# EAGLE board hasselblad production ready (EAGLE 6.5.0)
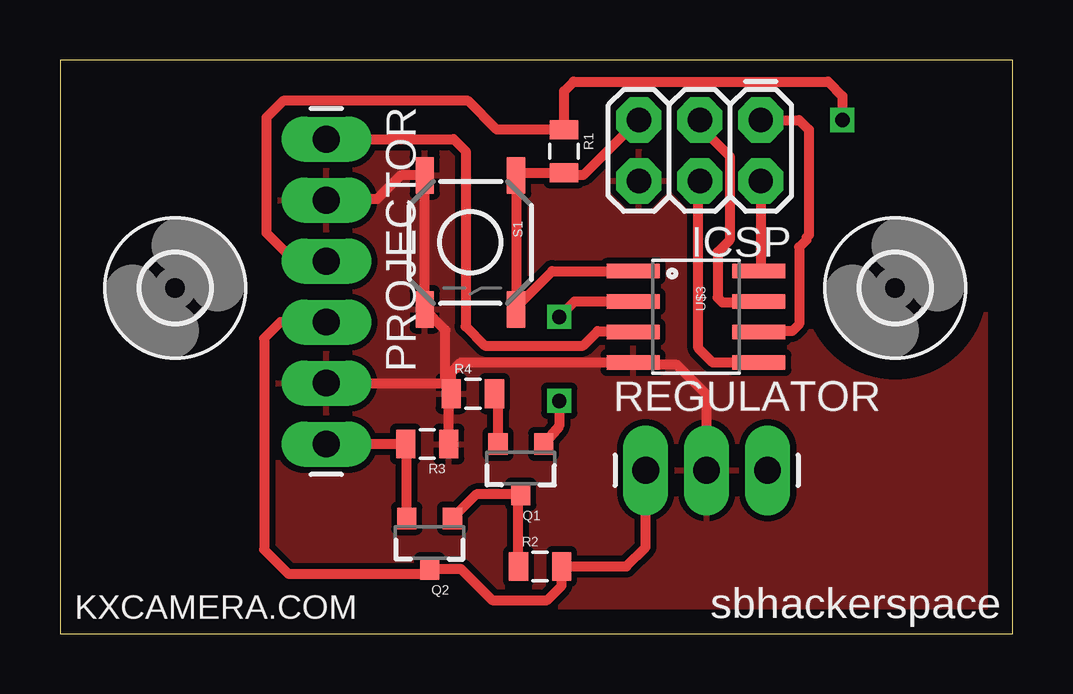
[diagram p0: board, top side]
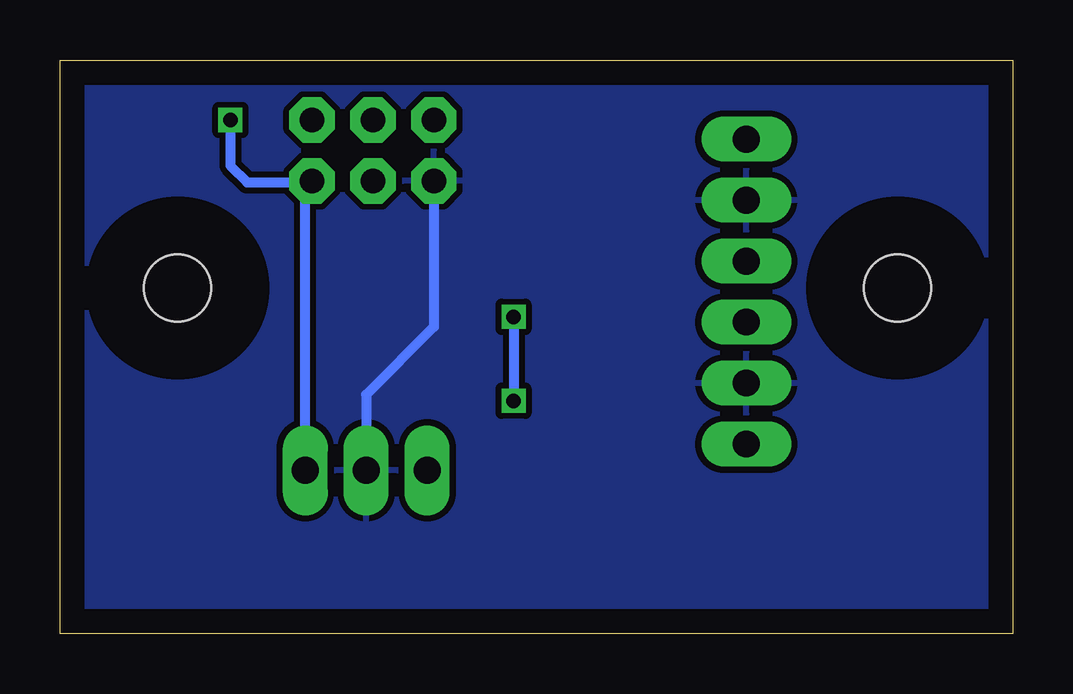
[diagram p1: board, bottom side, seen from below]

Size 39.7 x 23.9 mm. Coordinates in mm from the lower left corner, seen from the top.
Outline: 0,0 39.7,0 39.7,23.9 0,23.9 0,0
Copper layers (1*16): Top 0.035mm / dielectric 1.5mm / Bottom 0.035mm
Design rules "default": minimum track width 10mil, minimum drill 24mil, track to track 8mil, track to pad 8mil, pad to pad 8mil, via to via 8mil, smd to smd 8mil, copper to edge 40mil, drill to drill 8mil, minimum pad ring 10mil, minimum via ring 8mil, stop-mask expansion 4mil, vias tented up to drill 0mil, thermal gap 10mil

## Footprints (pad centres in the part's own frame; a part is rotated, then mirrored left to right if it is on the bottom)
2X3 = drill 1.016 pad 1.88 octagon: 1 0,0; 2 0,2.54; 3 2.54,0; 4 2.54,2.54; 5 5.08,0; 6 5.08,2.54
1X06_LONGPADS = drill 1.118 pad 1.88 long: 1 0,0; 2 2.54,0; 3 5.08,0; 4 7.62,0; 5 10.16,0; 6 12.7,0
SOT23-3 = smd 0.8 x 0.9: 1 -0.95,-1; 2 0.95,-1; 3 0,1.1
0805 = smd 0.8 x 1.2: 1 -0.9,0; 2 0.9,0
1X03_LONGPADS = drill 1.118 pad 1.88 long: 1 0,0; 2 2.54,0; 3 5.08,0
TACTILE-SWITCH-SMD = smd 1.524 x 0.762: 1 -2.794,1.905; 2 2.794,1.905; 3 -2.794,-1.905; 4 2.794,-1.905
2,8 = hole 2.8: 0,0
SO08 = smd 0.61 x 2.21: 1 -1.905,-2.616; 2 -0.635,-2.616; 3 0.635,-2.616; 4 1.905,-2.616; 5 1.905,2.616; 6 0.635,2.616; 7 -0.635,2.616; 8 -1.905,2.616

## Placement (x,y rotation side)
ICSP  [2X3]  29.2,21.4 180 top
PROJECTOR  [1X06_LONGPADS]  11.1,20.6 270 top
Q1  MOSFET-PCHANNEL  [SOT23-3]  19.2,6.9 180 top
Q2  MOSFET-PCHANNEL  [SOT23-3]  15.4,3.8 180 top
R1  [0805]  21,20.1 270 top
R2  [0805]  20,2.8 0 top
R3  [0805]  15.3,7.9 180 top
R4  [0805]  17.2,10 0 top
REGULATOR  [1X03_LONGPADS]  24.4,6.8 0 top
S1  [TACTILE-SWITCH-SMD]  17.1,16.3 270 top
U$1  [2,8]  4.8,14.4 0 top
U$2  [2,8]  34.8,14.4 0 top
U$3  ATTINY13SOIC  [SO08]  26.5,13.2 270 top

## Library data of the parts
ICSP PROJECTOR REGULATOR = SparkFun-Connectors
Q1 Q2 = SparkFun-DiscreteSemi; PROD_ID: TRANS-08285
R1-R4 = SparkFun-Passives
S1 = SparkFun-Electromechanical
U$1 U$2 = holes
U$3 = SparkFun-DigitalIC

## Nets
5V: ICSP.2 PROJECTOR.3 R1.1 REGULATOR.3 U$3.8
GND: ICSP.6 PROJECTOR.2 PROJECTOR.5 R3.1 R4.1 REGULATOR.2 S1.3 S1.4 U$3.4
N$1: ICSP.4 U$3.5
N$2: ICSP.5 R1.2 S1.1 S1.2 U$3.1
N$3: Q1.1 U$3.2
N$4: ICSP.1 U$3.6
N$6: ICSP.3 U$3.7
N$7: Q1.2 R4.2
N$9: Q1.3 Q2.1 R2.1
OUTPUT: PROJECTOR.6 Q2.2 R3.2
POT: PROJECTOR.1 U$3.3
VCC: PROJECTOR.4 Q2.3 R2.2 REGULATOR.1

## Tracks (layer width: path | path; a pad name or v marks a point on that pad's centre or on a via)
5V  (via drill 0.6)
  Top 0.406: PROJECTOR.3 11.08,15.5 9.8,15.5 8.6,16.7 8.6,21.5 9.3,22.2 17,22.2 18.2,21 R1.1 21,22.6 21.4,23 32,23 32.6,22.4 v32.6,21.4 | ICSP.2 29.2,15.19 U$3.8
  Bottom 0.406: REGULATOR.3 29.48,18.4 | 29.48,18.4 29.48,18.58 ICSP.2 | v32.6,21.4 32.6,19.5 31.9,18.8 29.88,18.8 29.48,18.4
GND
  Top 0.406: R3.1 16.2,10.1 R4.1 | PROJECTOR.2 11.13,18.09 13.2,18.1 14.19,19.09 S1.3 S1.4 16.06,12.64 16.06,10.44 | REGULATOR.2 26.94,9.96 25.7,11.2 23.98,11.2 U$3.4 16.7,11.3 16.3,10.9 R4.1 | PROJECTOR.5 16.06,10.44 | 16.06,10.44 R4.1
  Bottom 0.406: ICSP.6 24.12,12.78 26.94,9.96 REGULATOR.2
  pour Top (isolate 0.254): 0.3,23.6 39.5,23.6 39.5,0.2 0.3,0.2 0.3,23.5
  pour Bottom (isolate 0.254): 0.3,23.6 39.5,23.6 39.5,0.2 0.3,0.2
N$1
  Top 0.406: U$3.5 27.21,11.3 26.6,11.9 26.6,18.8 ICSP.4
N$2
  Top 0.406: U$3.1 20.5,15.1 19,13.6 S1.2 S1.1 19.09,19.19 R1.2 21.1,19.1 21.8,19.1 24.1,21.4 ICSP.5
N$3  (via drill 0.6)
  Top 0.406: U$3.2 21.44,13.84 v20.8,13.2 | v20.8,9.7 20.8,8.65 Q1.1
  Bottom 0.406: v20.8,13.2 v20.8,9.7
N$4
  Top 0.406: ICSP.1 30.8,21.4 31.2,21 31.2,16.6 31.1,16.5 31.1,16.4 30.8,16.1 30.8,12.9 30.5,12.6 29.15,12.6 U$3.6
N$6
  Top 0.406: ICSP.3 26.66,21.14 27.9,19.9 27.9,16.4 27.4,15.9 27.4,14 27.6,13.8 29.08,13.8 U$3.7
N$7
  Top 0.406: Q1.2 18.25,10.05 R4.2
N$9
  Top 0.406: R2.1 19.1,5.8 Q1.3 17.35,5.8 Q2.1
OUTPUT
  Top 0.406: Q2.2 14.45,7.85 R3.2 PROJECTOR.6
POT
  Top 0.406: PROJECTOR.1 16.4,20.6 16.9,20.1 16.9,12.8 17.7,12 21.8,12 22.4,12.6 23.85,12.6 U$3.3
VCC
  Top 0.406: PROJECTOR.4 9.18,12.98 8.5,12.3 8.5,3.5 9.5,2.5 15.2,2.5 Q2.3 16.7,2.7 18,1.4 20.3,1.4 20.9,2 R2.2 23.6,2.8 24.4,3.6 REGULATOR.1

## Text on the board
tNames: sbhackerspace | KXCAMERA.COM